# Altium PCB WCH_hairDrierCore_V1.5.PcbDoc (part 1 of 7)
Units mil, origin at the board's own origin, x right, y up, seen from the top; angles counter-clockwise.
Board outline 1683.54 x 992.13 mil, 4 copper layers (Top Layer, Mid-Layer 1, Mid-Layer 2, Bottom Layer); 84 components, 65 nets, 249 pads, 160 vias.
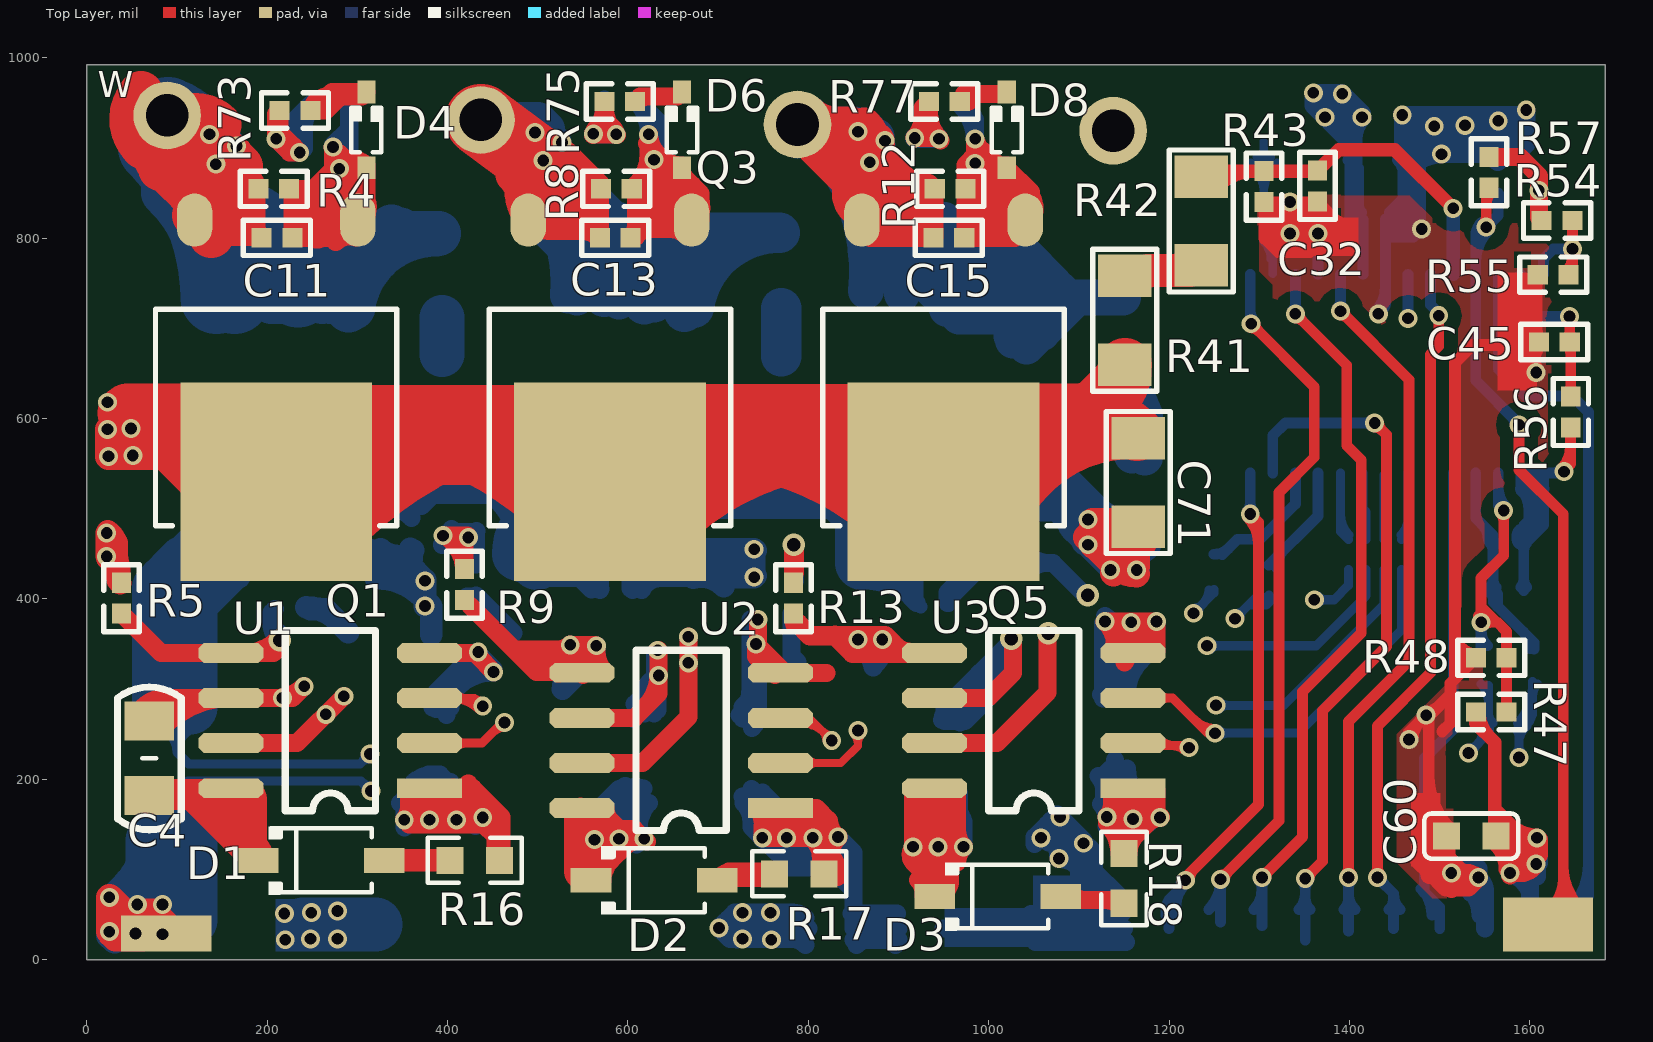
[diagram p0: Top Layer view]
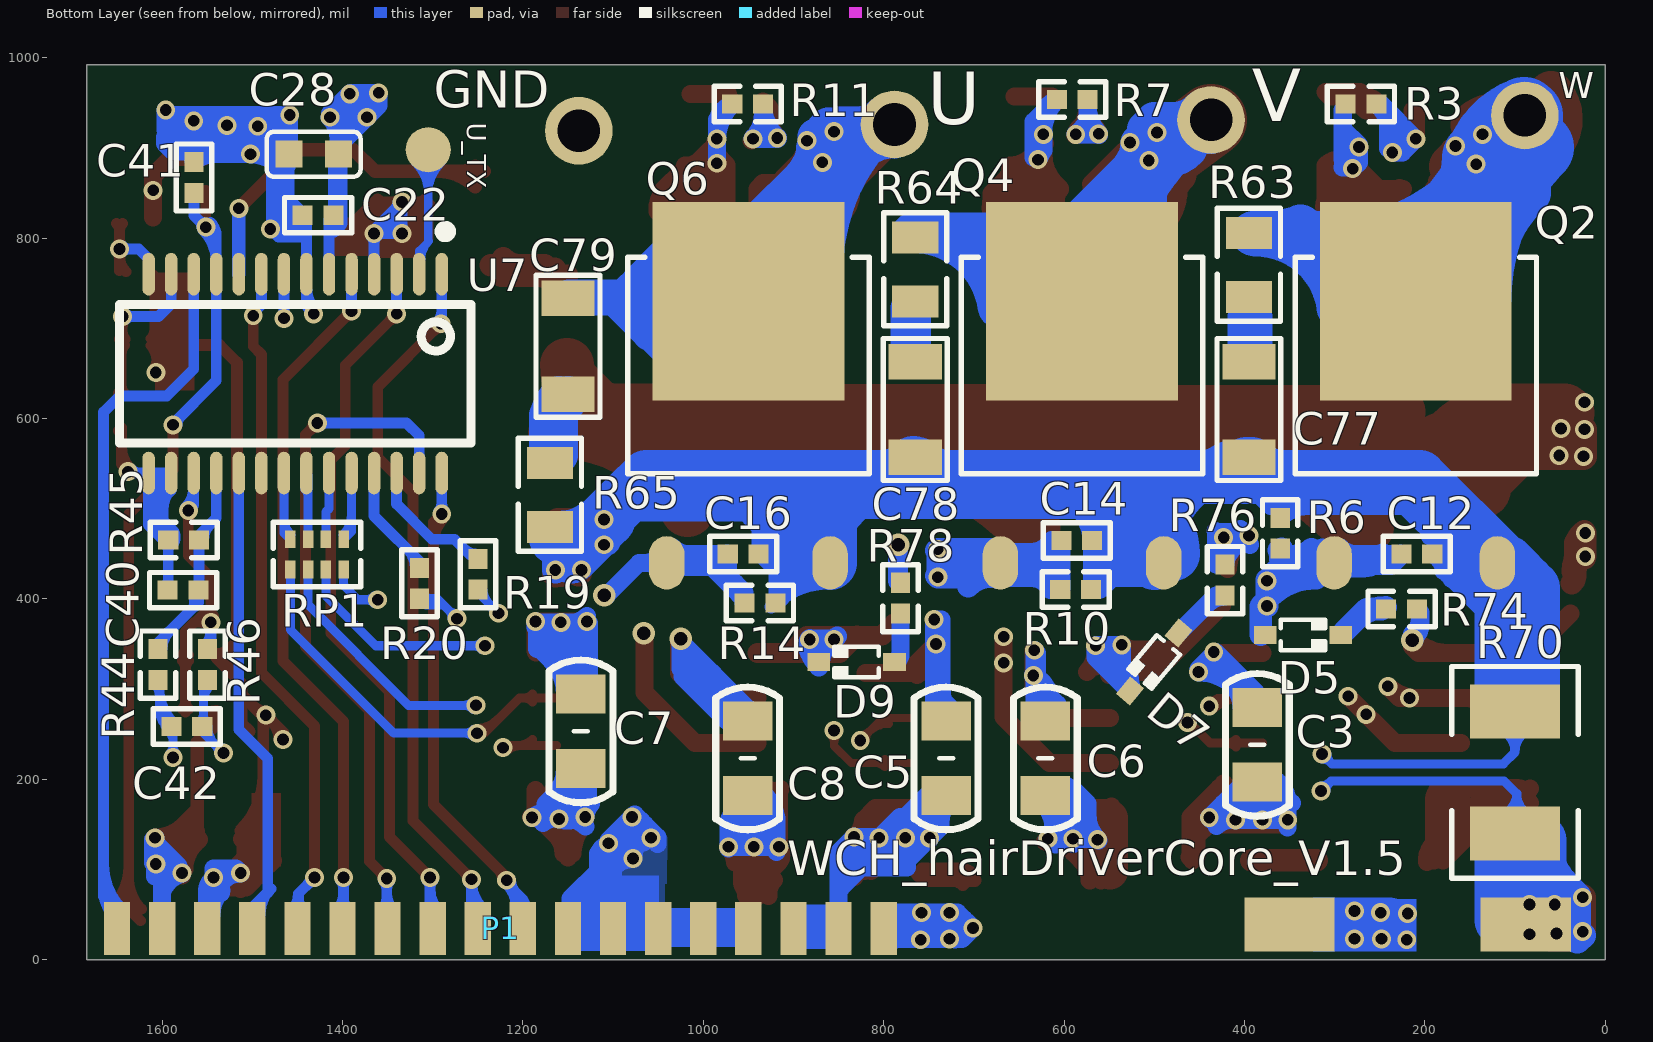
[diagram p1: Bottom Layer view, seen from below]
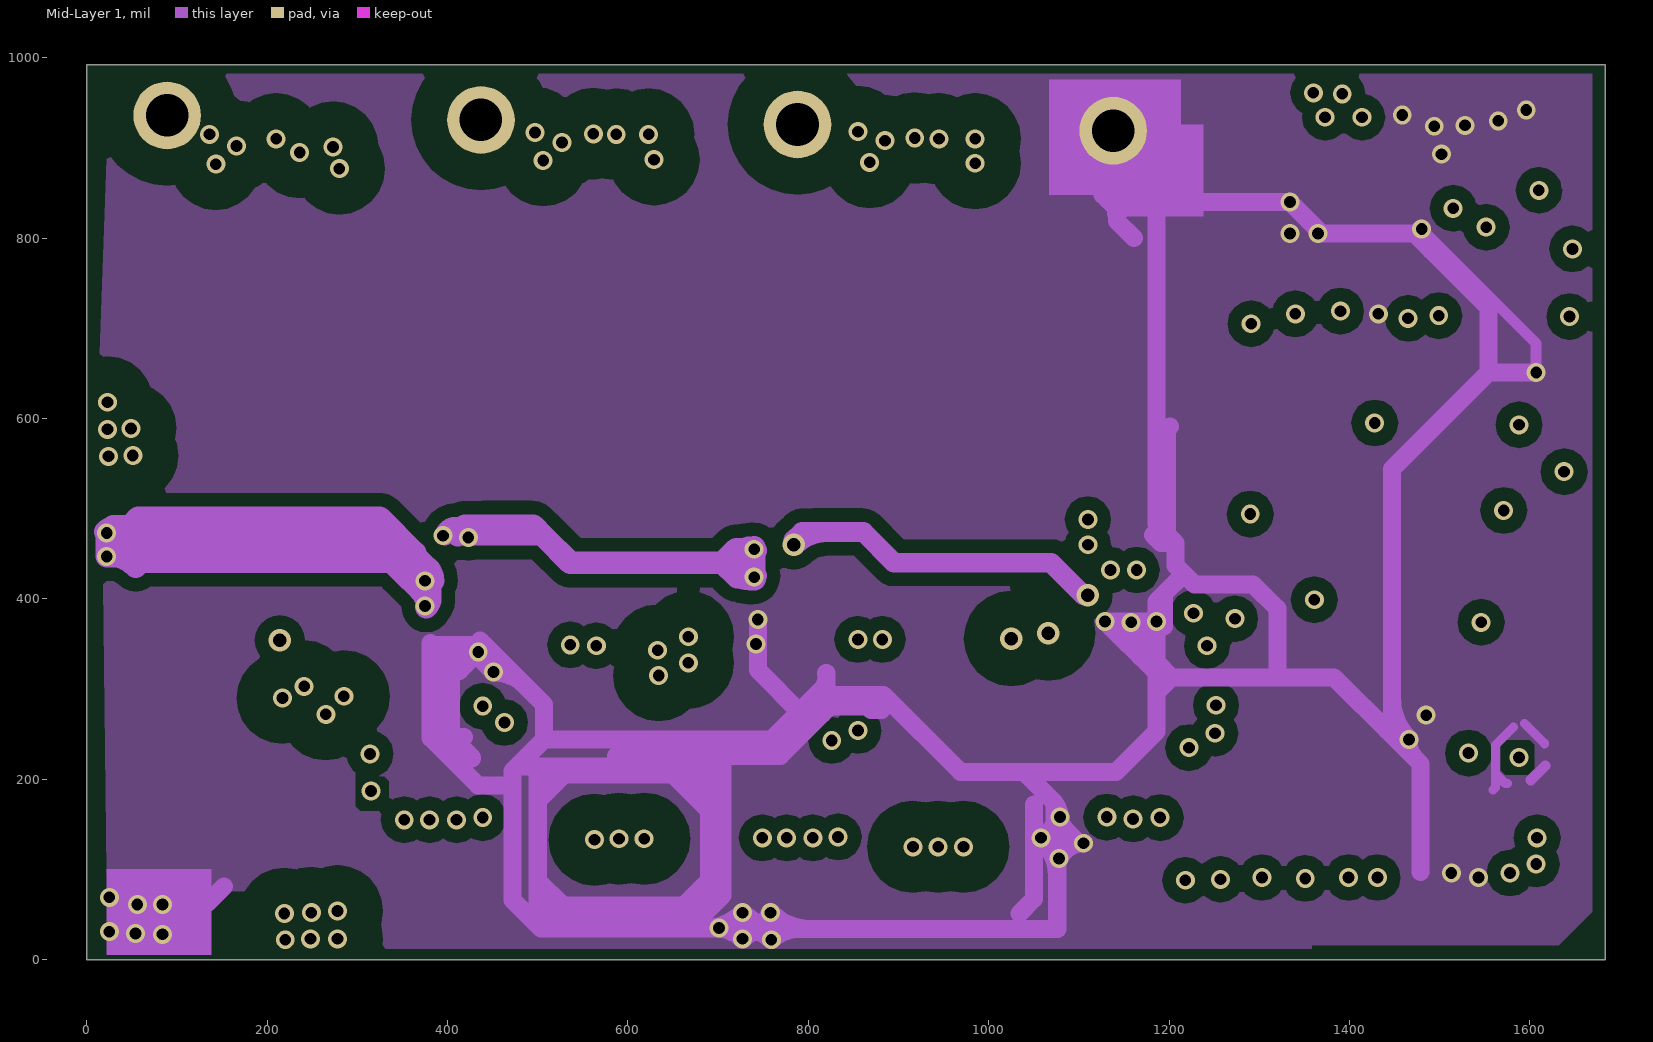
[diagram p2: Mid-Layer 1]
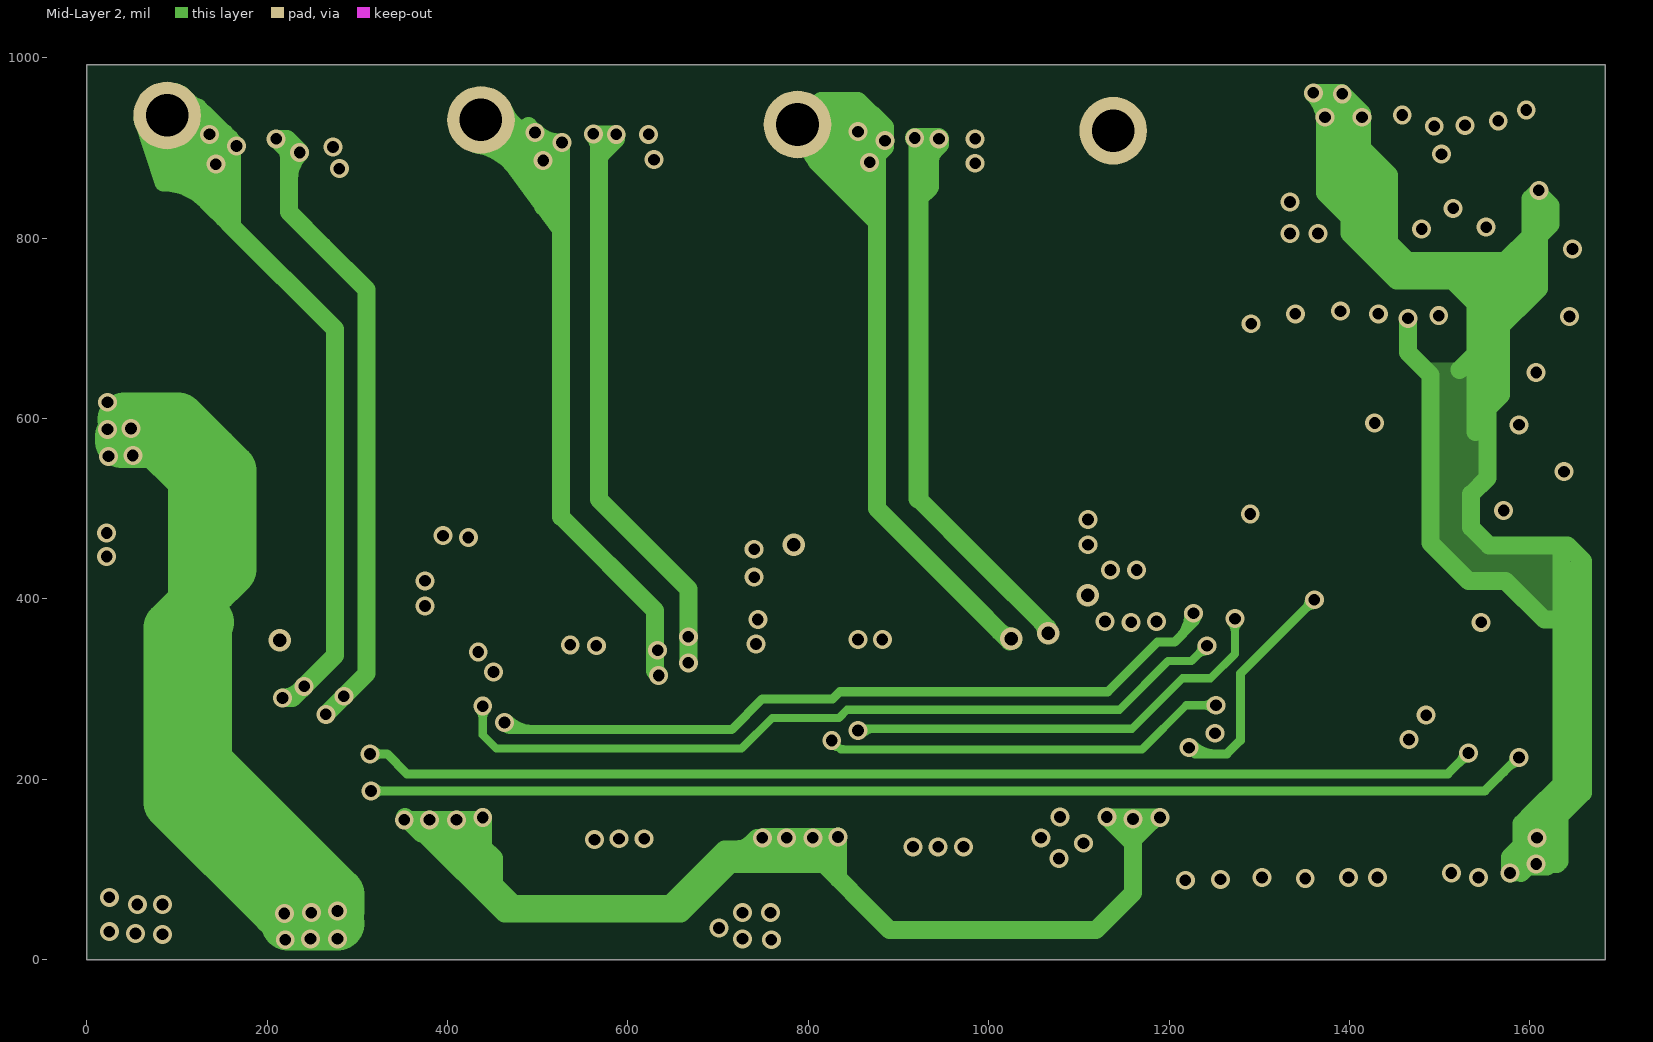
[diagram p3: Mid-Layer 2]

## Layer stack, top to bottom
Top Solder: solder mask 0.4, Solder Resist, Dk 3.5
Top Layer: signal copper 1.4
Dielectric1: core 12.6, FR-4, Dk 4.8
Mid-Layer 1: signal copper 1.4
Dielectric2: prepreg 12.6, FR-4, Dk 4.8
Mid-Layer 2: signal copper 1.4
Dielectric3: core 12.6, FR-4, Dk 4.8
Bottom Layer: signal copper 1.4
Bottom Solder: solder mask 0.4, Solder Resist, Dk 3.5

## Board outline
0,0 1683.54,0 1683.54,992.13 0,992.13

## Design rules (kind name [scope] priority, off if disabled: settings)
Clearance PolygonClearance_Hv [(InPolygon) vs InNetClass('HV')] p1: gap=40 ignorepadtopadclearanceinfootprint=FALSE except(0: Arc-Hole Track-Hole SMDPad-Hole THPad-Hole Via-Hole Fill-Hole Poly-Hole Region-Hole Text-Hole)
Clearance GNDClearance [InNet('GND') vs (IsComponentBody)] p2: gap=15 ignorepadtopadclearanceinfootprint=FALSE except(0: Arc-Hole Track-Hole SMDPad-Hole THPad-Hole Via-Hole Fill-Hole Poly-Hole Region-Hole Text-Hole)
Clearance PolygonClearance [(InPolygon)] p3: gap=15 ignorepadtopadclearanceinfootprint=FALSE except(0: Arc-Hole Track-Hole SMDPad-Hole THPad-Hole Via-Hole Fill-Hole Poly-Hole Region-Hole Text-Hole)
Clearance [All] p4: gap=6 ignorepadtopadclearanceinfootprint=FALSE except(0: Arc-Hole Track-Hole SMDPad-Hole THPad-Hole Via-Hole Fill-Hole Poly-Hole Region-Hole Text-Hole)
FabricationTestPointUsage TestPointUsage [All] p1: valid=0 allowmultiple=FALSE
FabricationTestpoint Testpoint [(IsPad And (OnTopLayer Or OnBottomLayer))] p1: side=3 testpointundercomponent=TRUE minsize=40 maxsize=100 preferedsize=60 minholesize=0 maxholesize=40 preferedholesize=32 testpointgrid=1 allowsidetop=TRUE allowsidebottom=TRUE usegrid=TRUE gridtolerance=0.01
Height [All] p1: minheight=0 maxheight=1574.8 prefheight=500
HoleSize [All] p1: absolutevalues=TRUE maxlimit=157.48 minlimit=1 maxpercent=80.000 minpercent=20.000
PlaneConnect [All] p1: planeconnectstyle=Relief reliefexpansion=20 reliefentries=4 reliefconductorwidth=12 reliefairgap=10
PolygonConnect PolygonConnect_1 [IsVia] p1: connectstyle=Direct reliefconductorwidth=10 reliefentries=4 polygonreliefangle="90 Angle" airgapwidth=10
PolygonConnect [All] p2: connectstyle=Relief reliefconductorwidth=15 reliefentries=4 polygonreliefangle="90 Angle" airgapwidth=10
RoutingVias [All] p1: holewidth=20 width=30 viastyle="Through Hole" minholewidth=13 minwidth=21 maxholewidth=40 maxwidth=80
SilkToSolderMaskClearance SilkscreenOverComponentPads [IsPad] p1: minsilkscreentomaskgap=10 clearancetoexposedcopper=TRUE
SolderMaskExpansion [All] p1: expansion=4 istentingtop=FALSE
Width [All] p1: maxlimit=300 minlimit=5 preferedwidth=10 midlayer1_maxwidth=100 midlayer2_maxwidth=100 minimp=50.000000 maximp=50.000000 favimp=50.000000
24 further rules are at their usual default settings.

## Classes and differential pairs
net class HV: M1_CH1_H M1_CH2_H M1_CH3_H M1_U M1_V M1_W NetC4_1 NetC6_1 NetC8_1 NetC11_1 NetC13_1 NetC15_1 V310

## Components (designator, comment, footprint, x,y, rotation, side; value= is the part's Value field where it differs from the comment)
C3 "2.2uF/25V/X7R" M_C0805 385,235 r90 bottom
C4 "1uF/50V/X7R" M_C0805 70,220 r90 top
C5 "2.2uF/25V/X7R" M_C0805 730,220 r90 bottom
C6 "1uF/50V/X7R" M_C0805 620,220 r90 bottom
C7 "2.2uF/25V/X7R" M_C0805 1135,250 r90 bottom
C8 "1uF/50V/X7R" M_C0805 950,220 r90 bottom
C11 "NC(470pF)" M_C0402- 210,800 r180 top
C12 "NC(470pF)" M_C0402- 208,450 r180 bottom
C13 "NC(470pF)" M_C0402- 585,800 r180 top
C14 "NC(470pF)" M_C0402- 585,465 r180 bottom
C15 "NC(470pF)" M_C0402- 955,800 r180 top
C16 "NC(470pF)" M_C0402- 955,450 r180 bottom
C22 "0.1uF" C0402S 1410,830 r0 bottom
C28 "10uF" 0603C 1430,890 r0 bottom
C32 "0.1uF" C0402S 1360,875 r270 top
C40 "22pF" C0402S 1594,405 r180 bottom
C41 "0.1uF" C0402S 1560,850 r90 bottom
C42 "100pF" C0402S 1589.73,253.73 r180 bottom
C45 "1nF" C0402S 1610,680 r0 top
C60 "10uF" 0603C 1537,134 r180 top
C71 "0.1uF/450V" 1206- 1165,530 r270 top
C77 "470pF/1kV" M_C1206- 395,610 r90 bottom
C78 "470pF/1kV" M_C1206- 765,610 r90 bottom
C79 "470pF/1kV" M_C1206- 1150,680 r90 bottom
D1 "ES1JL" SOD-123 260,110 r180 top
D2 "ES1JL" SOD-123 629,88 r180 top
D3 "ES1JL" SOD-123 1010,70 r180 top
D4 "4148" SOD523 310,920 r90 top
D5 "4148" SOD523 335,360 r180 bottom
D6 "4148" SOD523 660,920 r90 top
D7 "4148" SOD523 500,330 r310 bottom
D8 "4148" SOD523 1020,920 r90 top
D9 "4148" SOD523 830,330 r0 bottom
P1 "18PIN" P1.27-18-SMD 1650,35 r180 bottom
Q1 "PECN5N50" D-PAK-1 210,800 r180 top
Q2 "PECN5N50" D-PAK-1 210,460 r180 bottom
Q3 "PECN5N50" D-PAK-1 580,800 r180 top
Q4 "PECN5N50" D-PAK-1 580,460 r180 bottom
Q5 "PECN5N50" D-PAK-1 950,800 r180 top
Q6 "PECN5N50" D-PAK-1 950,460 r180 bottom
R3 "270Ω" M_R0402- 270,950 r180 bottom
R4 "10k" 0402S 210,850 r0 top
R5 "270Ω" M_R0402- 40,400 r270 top
R6 "10k" 0402S 365,470 r270 bottom
R7 "270Ω" M_R0402- 590,955 r180 bottom
R8 "10k" 0402S 590,850 r0 top
R9 "270Ω" M_R0402- 420,415 r270 top
R10 "10k" 0402S 590,415 r0 bottom
R11 "270Ω" M_R0402- 950,950 r180 bottom
R12 "10k" 0402S 960,850 r0 top
R13 "270Ω" M_R0402- 785,400 r270 top
R14 "10k" 0402S 940,400 r0 bottom
R16 "10 Ω" 0603 430,110 r0 top
R17 "10 Ω" 0603 790,95 r0 top
R18 "10 Ω" 0603 1150,90 r90 top
R19 "100 Ω" C0402S 1245,410 r90 bottom
R20 "100 Ω" C0402S 1310,400 r90 bottom
R41 "560k 1%" 1206- 1150,710 r270 top
R42 "560k 1%" 1206- 1235,820 r270 top
R43 "7.5k 1%" 0402S 1310,860 r90 top
R44 "7.5k 1%" 0402S 1600,330 r90 bottom
R45 "28k 1%" 0402S 1579,470 r0 bottom
R46 "7.5k 1%" 0402S 1545,330 r90 bottom
R47 "56k 1%" 0402S 1560,270 r0 top
R48 "56k 1%" 0402S 1560,330 r0 top
R54 "2k 1%" 0402S 1633,815 r0 top
R55 "10k 1%" 0402S 1623,764 r180 top
R56 "10k" 0402S 1650,610 r90 top
R57 "10k 1%" 0402S 1550,870 r270 top
R63 "10Ω" M_R0805- 395,770 r90 bottom
R64 "10Ω" M_R0805- 765,765 r90 bottom
R65 "10Ω" M_R0805- 1170,515 r90 bottom
R70 "0R100" 1210 100,140 r90 bottom
R73 "100Ω" M_R0402- 230,940 r180 top
R74 "100Ω" M_R0402- 225,390 r180 bottom
R75 "100Ω" M_R0402- 590,950 r180 top
R76 "100Ω" M_R0402- 420,420 r270 bottom
R77 "100Ω" M_R0402- 950,950 r180 top
R78 "100Ω" M_R0402- 780,400 r270 bottom
RP1 "100 Ω" RP4-0402 1430,450 r0 bottom
U1 "LN4201" SOP8 380,190 r90 top
U2 "LN4201" SOP8 769,168 r90 top
U3 "LN4201" SOP8 1160,190 r90 top
U7 "CH32V203G8R" QSOP28 1290,760 r0 bottom

## Footprints (in the part's own frame and the unit in brackets; to place one, negate y for a bottom-side part, rotate by r counter-clockwise, add the part's x,y. Pads: shape width x height; smd on the part's side, far side on the other; paste and mask are expansions set on the pad)
0402S [mm]
  rect 0.566x0.54 smd mask+0.051: 1(-0.505,0.118) 2(0.361,0.118)
  silkscreen extent -1.02,-0.38 0.87,0.62
0603 [mil]
  rect 30x30 smd: 1(-27.5,0) 2(27.5,0)
  silkscreen extent -52,-25 52,25
0603C [mil]
  rect 30x30 smd: 1(-25.5,-3) 2(29.5,-3)
  silkscreen extent -50,-28 54,22
1206- [mm]
  rect 1.2x1.5 smd: 1(-1.224,0.018) 2(1.276,0.018)
  silkscreen extent -1.97,-0.88 2.03,0.92
1210 [mil]
  rect 60x100 smd: 1(0,0) 2(135,0)
  silkscreen extent -50,-70 185,70
C0402S [mm]
  rect 0.566x0.54 smd mask+0.051: 1(0.003,0.118) 2(0.869,0.118)
  silkscreen extent -0.51,-0.38 1.38,0.62
D-PAK-1 [mm]
  oval 1x1.5 smd: 1(-2.3,-0.508) 3(2.3,-0.508)
  rect 5.4x5.588 smd: 2(0,6.858)
  silkscreen extent -3.4,2 3.4,8.1
M_C0402- [mm]
  rect 0.566x0.54 smd mask+0.051: 1(-0.454,-0.009) 2(0.412,-0.009)
  silkscreen extent -0.97,-0.51 0.92,0.49
M_C0805 [mm]
  rect 1.1x1.4 smd: 1(-0.972,0.019) 2(1.128,0.019)
  silkscreen extent -1.93,-0.88 2.09,0.92
M_C1206- [mm]
  rect 1x1.5 smd: 1(-1.35,0) 2(1.35,0)
  silkscreen extent -2,-0.9 2,0.9
M_R0402- [mm]
  rect 0.566x0.54 smd mask+0.051: 1(-0.454,-0.035) 2(0.412,-0.035)
  silkscreen extent -0.97,-0.53 0.92,0.46
M_R0805- [mm]
  rect 0.9x1.3 smd: 1(-0.9,0) 2(0.9,0)
  silkscreen extent -1.57,-0.89 1.6,0.89
P1.27-18-SMD [mm]
  rect 0.74x1.5 smd: 1(-0.001,-0.01) 2(1.269,-0.01) 3(2.539,-0.01) 4(3.809,-0.01) 5(5.079,-0.01) 6(6.349,-0.01) 7(7.619,-0.01) 8(8.889,-0.01) 9(10.159,-0.01) 10(11.429,-0.01) 11(12.699,-0.01) 12(13.969,-0.01) 13(15.239,-0.01) 14(16.509,-0.01) 15(17.779,-0.01) 16(19.049,-0.01) 17(20.319,-0.01) 18(21.589,-0.01)
QSOP28 [mm]
  oval 0.35x1.2 smd mask+0.051: 1(0,0) 2(0.635,0) 3(1.27,0) 4(1.905,0) 5(2.54,0) 6(3.175,0) 7(3.81,0) 8(4.445,0) 9(5.08,0) 10(5.715,0) 11(6.35,0) 12(6.985,0) 13(7.62,0) 14(8.255,0) 15(8.255,5.6) 16(7.62,5.6) 17(6.985,5.6) 18(6.35,5.6) 19(5.715,5.6) 20(5.08,5.6) 21(4.445,5.6) 22(3.81,5.6) 23(3.175,5.6) 24(2.54,5.6) 25(1.905,5.6) 26(1.27,5.6) 27(0.635,5.6) 28(0,5.6)
  silkscreen extent -0.82,-1.35 9.08,4.75
RP4-0402 [mm]
  rect 0.3x0.505 smd paste+0 mask+0.051: 1(-0.791,-0.408) 2(-0.291,-0.408) 3(0.209,-0.408) 4(0.709,-0.408) 5(0.709,0.447) 6(0.209,0.447) 7(-0.291,0.447) 8(-0.791,0.447)
  silkscreen extent -1.27,-0.89 1.19,0.93
SOD523 [mil]
  rect 25x20 smd: 1(-42,0) 2(42,0)
  silkscreen extent -25,-19 25,19
SOD-123 [mil]
  rect 45x27.56 smd: 1(-70,0) 2(70,0)
  silkscreen extent -56,-38 59,38
SOP8 [mil]
  rect 22x72 smd: 1(0,0)
  oct 22x72 smd: 2(50,0) 3(100,0) 4(150,0) 5(150,220) 6(100,220) 7(50,220) 8(0,220)
  silkscreen extent -25,60 175,160

## Part data
C3 C4 C5 C6 C7 C8 C11 C12 C13 C14 C15 C16 C22 C28 C32 C40 C41 C42 C45 C60 C71 C77 C78 C79: library part "Cap Semi", "Capacitor (Semiconductor SIM Model)"
D1 D2 D3 D4 D5 D6 D7 D8 D9: library part "Diode 1N4148", "High Conductance Fast Diode"
Q1 Q2 Q3 Q4 Q5 Q6: library part MOSFET-N
R3 R4 R5 R6 R7 R8 R9 R10 R11 R12 R13 R14 R16 R17 R18 R19 R20 R41 R42 R43 R44 R45 R46 R47 R48 R54 R55 R56 R57 R63 R64 R65 R70 R73 R74 R75 R76 R77 R78: library part Res2, "Resistor"
RP1: library part Rp4
U1 U2 U3: library part IR2101SPBF
U7: "RISC-V LMD-MCU, 144MHz, for motor & wireless charging"

## Free pads (board coordinates)
  rect 100x40 smd: 0(88,29)
  rect 100x60 smd far side: 0(88,39) 0(350,39)
  round 50 smd far side: 0(1305,898)
  rect 100x60 smd: 0(1620,39)
  round 75 hole 47.24 mask+3.94: 1(89,936) 1(437,931) 1(788,926) 1(1138,919)

## Via types
v1: diameter 21, hole 13, Top Layer to Bottom Layer, tented both sides, 155 vias
v2: diameter 25, hole 15, Top Layer to Bottom Layer, tented both sides, 5 vias

## Nets (pads, with @x,y where several pads share a name; then routed paths per layer and width w, separated by ;. In a path a pad name is that pad's centre, name@x,y a point inside that pad or via, vN(x,y) a via of type N, cw(c..) or ccw(c..) an arc to the next point about the centre after c; other vN are vias at no path point)
ADC_I1: C40.1 R45.2 R56.1 U7.15 U7.16 | length 1210.3
  Top Layer w12: v1@1635,539.53 1645,549.53 1645,589.77 R56.1@1645.37,590.13 ; v1@1634.82,544.18 ccw(c1610.24,568.76) 1645,568.76 ; v1@1634.82,544.18 ccw(c1610.24,568.76) 1645,568.76 ; v1@1634.82,544.18 ccw(c1610.24,568.76) 1645,568.76 ; 1645,577.56 cw(c1657.44,577.56) R56.1@1648.64,586.36 ; 1645,577.56 cw(c1657.44,577.56) R56.1@1648.64,586.36 ; 1645,577.56 cw(c1657.44,577.56) R56.1@1648.64,586.36
  Bottom Layer w12: C40.1@1593.22,409 R45.2@1593.22,470.37 ; R45.2@1593.22,465.37 1598.37,465.37 1615,482 1615,496 ; R45.2@1594.37,470.37 R45.2@1593.22,470.37 ; 1598,512 1590,520 U7.16@1590,539.53 U7.15@1615,539.53 1615,496 ; 1604,485 1615,496 ; 1607,538.53 1607,488 ; v1@1638,539.53 1599,539.53 1599,487 ; R45.2@1587.74,461.06 cw(c1597.77,468.29) 1589.03,477.03 ; R45.2@1587.74,461.06 cw(c1597.77,468.29) 1589.03,477.03 ; R45.2@1587.74,461.06 cw(c1597.77,468.29) 1589.03,477.03 ; U7.16@1589.37,522.17 cw(c1566.12,498.92) 1599,498.92 ; U7.16@1589.37,522.17 cw(c1566.12,498.92) 1599,498.92 ; U7.16@1589.37,522.17 cw(c1566.12,498.92) 1599,498.92 ; R45.2@1589.94,462.1 cw(c1582.04,454.19) 1593.22,454.19 ; R45.2@1589.94,462.1 cw(c1582.04,454.19) 1593.22,454.19 ; R45.2@1589.94,462.1 cw(c1582.04,454.19) 1593.22,454.19 ; R45.2@1589.94,468.64 ccw(c1582.04,476.55) 1593.22,476.55 ; R45.2@1589.94,468.64 ccw(c1582.04,476.55) 1593.22,476.55 ; R45.2@1589.94,468.64 ccw(c1582.04,476.55) 1593.22,476.55 ; C40.1@1590.09,412.9 ccw(c1582.53,420.46) 1593.21,420.46 ; C40.1@1590.09,412.9 ccw(c1582.53,420.46) 1593.21,420.46 ; C40.1@1590.09,412.9 ccw(c1582.53,420.46) 1593.21,420.46 ; U7.16@1590.89,522.8 ccw(c1599.79,522.8) 1593.5,516.5 ; U7.16@1590.89,522.8 ccw(c1599.79,522.8) 1593.5,516.5 ; U7.16@1590.89,522.8 ccw(c1599.79,522.8) 1593.5,516.5 ; 1593.22,421.16 ccw(c1604.89,421.16) C40.1@1596.63,412.9 ; 1593.22,421.16 ccw(c1604.89,421.16) C40.1@1596.63,412.9 ; 1593.22,421.16 ccw(c1604.89,421.16) C40.1@1596.63,412.9 ; 1593.22,454.19 cw(c1604.39,454.19) R45.2@1596.49,462.1 ; 1593.22,454.19 cw(c1604.39,454.19) R45.2@1596.49,462.1 ; 1593.22,454.19 cw(c1604.39,454.19) R45.2@1596.49,462.1 ; R45.2@1593.22,470.37 1593.22,481.21 1599,487 ; 1593.22,476.55 ccw(c1604.39,476.55) R45.2@1596.49,468.64 ; 1593.22,476.55 ccw(c1604.39,476.55) R45.2@1596.49,468.64 ; 1593.22,476.55 ccw(c1604.39,476.55) R45.2@1596.49,468.64 ; R45.2@1593.72,470 ccw(c1593.72,492.4) 1609.56,476.56 ; R45.2@1593.72,470 ccw(c1593.72,492.4) 1609.56,476.56 ; R45.2@1593.72,470 ccw(c1593.72,492.4) 1609.56,476.56 ; R45.2@1597.36,468.23 cw(c1603.74,473.26) 1598,479 ; R45.2@1597.36,468.23 cw(c1603.74,473.26) 1598,479 ; R45.2@1597.36,468.23 cw(c1603.74,473.26) 1598,479 ; R45.2@1597.48,468.08 cw(c1609.36,476.64) 1599,487 ; R45.2@1597.48,468.08 cw(c1609.36,476.64) 1599,487 ; R45.2@1597.48,468.08 cw(c1609.36,476.64) 1599,487 ; 1597.86,530.65 cw(c1595.09,527.89) 1599,527.89 ; 1597.86,530.65 cw(c1595.09,527.89) 1599,527.89 ; 1597.86,530.65 cw(c1595.09,527.89) 1599,527.89 ; 1598,479 1607,488 ; R45.2@1598.34,465.59 cw(c1627.98,467.02) 1607,488 ; R45.2@1598.34,465.59 cw(c1627.98,467.02) 1607,488 ; R45.2@1598.34,465.59 cw(c1627.98,467.02) 1607,488 ; 1607,501.33 cw(c1636.46,501.33) U7.15@1615.63,522.17 ; 1607,501.33 cw(c1636.46,501.33) U7.15@1615.63,522.17 ; 1607,501.33 cw(c1636.46,501.33) U7.15@1615.63,522.17 ; 1607,530.3 cw(c1607.49,530.3) 1607.14,530.65 ; 1607,530.3 cw(c1607.49,530.3) 1607.14,530.65 ; 1607,530.3 cw(c1607.49,530.3) 1607.14,530.65 ; 1623.58,539.53 ccw(c1623.58,555.42) v1@1634.82,544.18 ; 1623.58,539.53 ccw(c1623.58,555.42) v1@1634.82,544.18 ; 1623.58,539.53 ccw(c1623.58,555.42) v1@1634.82,544.18
  other v1: 1638,541
ADC_NTC: C41.1 pad.0@1620,39 R57.2 U7.11 | length 1832.2
  Top Layer w12: v1(1551.58,812.09) R57.2@1551.58,852.74 ; v1(1588,593) 1588,543 1637,494 1637,56 pad.0@1624,43 ; v1@1548.4,815.27 ccw(c1540.72,822.95) 1551.58,822.95 ; v1@1548.4,815.27 ccw(c1540.72,822.95) 1551.58,822.95 ; v1@1548.4,815.27 ccw(c1540.72,822.95) 1551.58,822.95 ; 1551.58,822.95 ccw(c1562.45,822.95) v1@1554.76,815.27 ; 1551.58,822.95 ccw(c1562.45,822.95) v1@1554.76,815.27 ; 1551.58,822.95 ccw(c1562.45,822.95) v1@1554.76,815.27 ; 1551.58,836.74 cw(c1573.17,836.74) R57.2@1557.9,852.01 ; 1551.58,836.74 cw(c1573.17,836.74) R57.2@1557.9,852.01 ; 1551.58,836.74 cw(c1573.17,836.74) R57.2@1557.9,852.01 ; v1@1584.82,589.82 cw(c1577.14,582.14) 1588,582.14 ; v1@1584.82,589.82 cw(c1577.14,582.14) 1588,582.14 ; v1@1584.82,589.82 cw(c1577.14,582.14) 1588,582.14 ; 1588,582.14 cw(c1598.86,582.14) v1@1591.18,589.82 ; 1588,582.14 cw(c1598.86,582.14) v1@1591.18,589.82 ; 1588,582.14 cw(c1598.86,582.14) v1@1591.18,589.82 ; pad.0@1623.03,55.97 ccw(c1589.3,89.7) 1637,89.7 ; pad.0@1623.03,55.97 ccw(c1589.3,89.7) 1637,89.7 ; pad.0@1623.03,55.97 ccw(c1589.3,89.7) 1637,89.7 ; 1637,75.21 ccw(c1676.21,75.21) pad.0@1648.49,47.49 ; 1637,75.21 ccw(c1676.21,75.21) pad.0@1648.49,47.49 ; 1637,75.21 ccw(c1676.21,75.21) pad.0@1648.49,47.49 ; 1637,104.18 ccw(c1705.18,104.18) pad.0@1656.97,55.97 ; 1637,104.18 ccw(c1705.18,104.18) pad.0@1656.97,55.97 ; 1637,104.18 ccw(c1705.18,104.18) pad.0@1656.97,55.97
  Bottom Layer w12: C41.1@1564.63,850.13 1564.63,825.13 1540,800.51 U7.11@1540,760 1540,672 1540,642 v1@1588,594 ; U7.11@1540,773.26 cw(c1590.4,773.26) v1@1554.76,808.9 ; U7.11@1540,773.26 cw(c1590.4,773.26) v1@1554.76,808.9 ; U7.11@1540,773.26 cw(c1590.4,773.26) v1@1554.76,808.9 ; 1540,795.71 cw(c1551.88,795.71) v1@1551.66,807.59 ; 1540,795.71 cw(c1551.88,795.71) v1@1551.66,807.59 ; 1540,795.71 cw(c1551.88,795.71) v1@1551.66,807.59 ; 1540,802.23 cw(c1561.43,802.23) v1@1546.28,817.39 ; 1540,802.23 cw(c1561.43,802.23) v1@1546.28,817.39 ; 1540,802.23 cw(c1561.43,802.23) v1@1546.28,817.39 ; 1543.9,804.4 cw(c1551.58,796.72) v1@1551.58,807.59 ; 1543.9,804.4 ccw(c1536.22,812.09) v1@1547.08,812.09 ; 1543.9,804.4 cw(c1551.58,796.72) v1@1551.58,807.59 ; 1543.9,804.4 ccw(c1536.22,812.09) v1@1547.08,812.09 ; 1543.9,804.4 ccw(c1536.22,812.09) v1@1547.08,812.09 ; 1543.9,804.4 cw(c1551.58,796.72) v1@1551.58,807.59 ; v1@1551.58,816.59 ccw(c1551.58,827.45) 1559.26,819.77 ; v1@1551.58,816.59 ccw(c1551.58,827.45) 1559.26,819.77 ; v1@1551.58,816.59 ccw(c1551.58,827.45) 1559.26,819.77 ; v1@1556.08,812.09 cw(c1566.95,812.09) 1559.26,819.77 ; v1@1556.08,812.09 cw(c1566.95,812.09) 1559.26,819.77 ; v1@1556.08,812.09 cw(c1566.95,812.09) 1559.26,819.77 ; C41.1@1561.36,846.36 cw(c1553.45,838.45) 1564.63,838.45 ; C41.1@1561.36,846.36 cw(c1553.45,838.45) 1564.63,838.45 ; C41.1@1561.36,846.36 cw(c1553.45,838.45) 1564.63,838.45 ; 1564.63,838.45 cw(c1575.81,838.45) C41.1@1567.9,846.36 ; 1564.63,838.45 cw(c1575.81,838.45) C41.1@1567.9,846.36 ; 1564.63,838.45 cw(c1575.81,838.45) C41.1@1567.9,846.36 ; 1579.61,602.39 cw(c1570.22,593) v1@1583.5,593 ; 1579.61,602.39 cw(c1570.22,593) v1@1583.5,593 ; 1579.61,602.39 cw(c1570.22,593) v1@1583.5,593
ADC_VBUS: C32.1 R42.1 R43.2 U7.10 | length 564.1
  Top Layer w15: R42.1@1243.14,874.21 R43.2@1305.37,874.21 C32.1@1363.98,874.21 ; C32.1@1364.63,874.87 1364.86,874.87 1388,898 1450,898 v1(1515,833) ; R42.1@1253.03,856.8 cw(c1295.08,814.75) R43.2@1295.08,874.22 ; R42.1@1253.03,856.8 cw(c1295.08,814.75) R43.2@1295.08,874.22 ; R42.1@1253.03,856.8 cw(c1295.08,814.75) R43.2@1295.08,874.22 ; R42.1@1253.03,879.6 ccw(c1266.02,892.59) 1266.02,874.21 ; R42.1@1253.03,879.6 ccw(c1266.02,892.59) 1266.02,874.21 ; R42.1@1253.03,879.6 ccw(c1266.02,892.59) 1266.02,874.21
  Bottom Layer w15: U7.10@1515,760 v1(1515,833)